# Altium PCB STM32.PcbDoc (part 5 of 6)
Units mm, origin at the board's own origin, x right, y up, seen from the top; angles counter-clockwise.
Board outline 99.69 x 99.7 mm, 2 copper layers (Top Layer, Bottom Layer); 150 components, 142 nets, 668 pads, 273 vias.
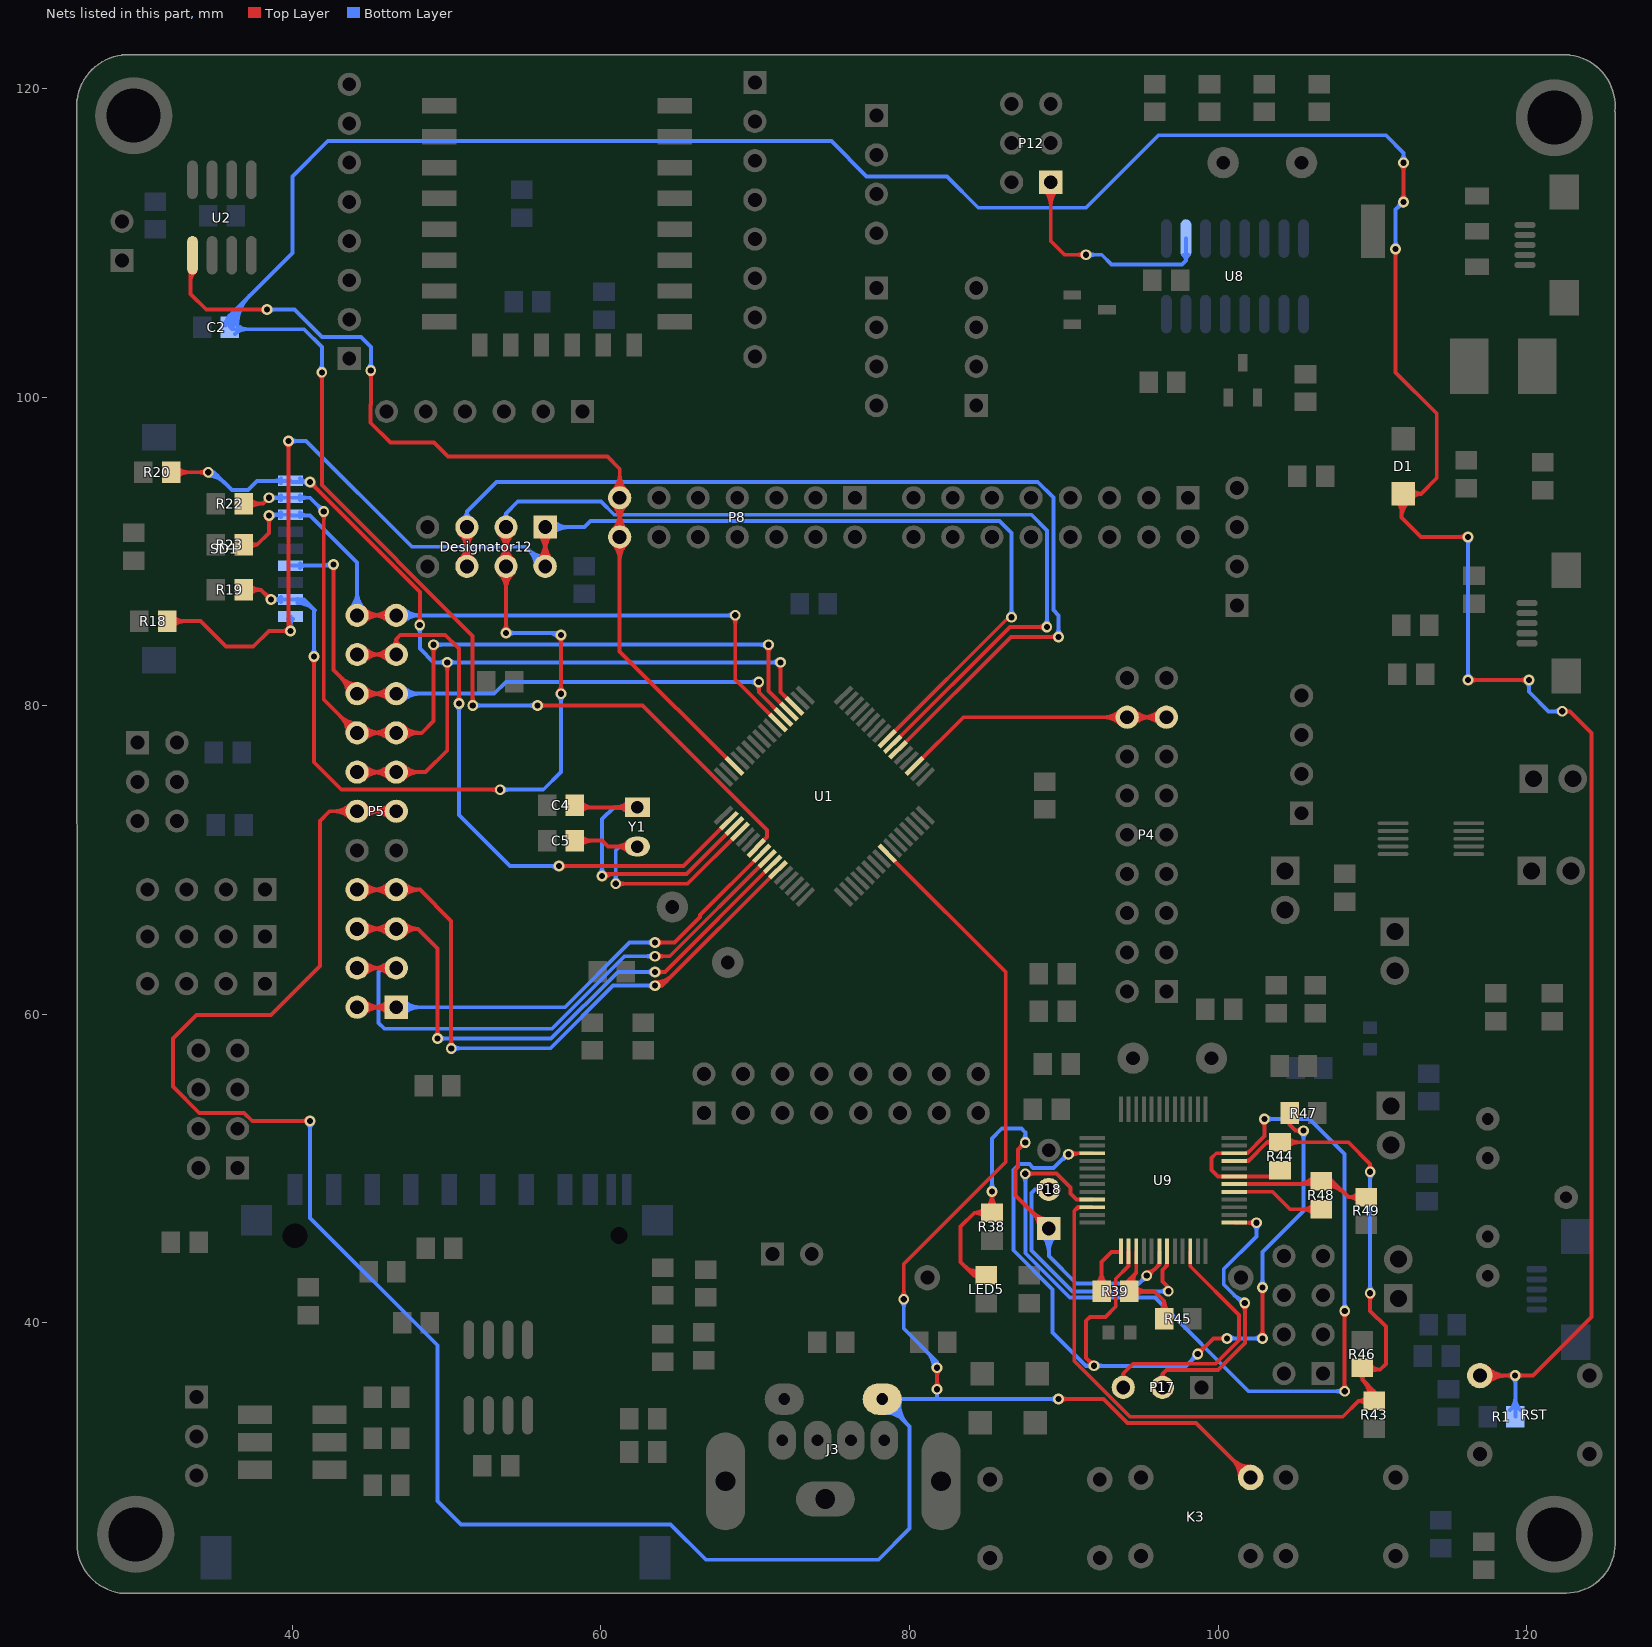
[diagram p5: the nets of this part, all layers, seen from the top]

## Via types
v1: diameter 0.7, hole 0.4, Top Layer to Bottom Layer, 272 vias
v2: diameter 1.27, hole 0.711, Top Layer to Bottom Layer, 1 vias

## Nets (pads, with @x,y where several pads share a name; then routed paths per layer and width w, separated by ;. In a path a pad name is that pad's centre, name@x,y a point inside that pad or via, vN(x,y) a via of type N, cw(c..) or ccw(c..) an arc to the next point about the centre after c; other vN are vias at no path point) (continued)
PB9: P8.13 P8.14 U1.62 U2.1 | length 79.6
  Top Layer w0.25: 33.401,107.433 cw(c34.378,107.433) U2.1@33.687,108.124 ; U2.1@33.528,109.183 33.401,109.056 33.401,106.68 34.417,105.664 v1(38.354,105.664) ; v1@38.195,105.505 ccw(c37.811,105.121) 37.811,105.664 ccw(c37.811,106.207) v1@38.195,105.823 ; v1@44.926,101.568 cw(c44.542,101.184) 45.085,101.184 cw(c45.628,101.184) v1@45.244,101.568 ; v1(45.085,101.727) 45.085,99.508 45.074,99.497 45.074,98.331 46.355,97.049 49.189,97.049 50.091,96.147 60.423,96.147 61.214,95.356 P8.13@61.214,93.472 P8.14@61.214,90.932 ; P8.14@60.772,91.374 ccw(c59.705,92.441) 61.214,92.441 ccw(c62.723,92.441) P8.14@61.656,91.374 ; P8.13@60.772,93.03 cw(c59.705,91.963) 61.214,91.963 cw(c62.723,91.963) P8.13@61.656,93.03 ; P8.13@60.772,93.914 ccw(c59.705,94.981) 61.214,94.981 ccw(c62.723,94.981) P8.13@61.656,93.914 ; P8.14@60.949,91.197 ccw(c60.309,91.837) 61.214,91.837 ccw(c62.119,91.837) P8.14@61.479,91.197 ; P8.13@60.949,93.207 cw(c60.309,92.567) 61.214,92.567 cw(c62.119,92.567) P8.13@61.479,93.207 ; P8.13@60.949,93.737 ccw(c60.309,94.377) 61.214,94.377 ccw(c62.119,94.377) P8.13@61.479,93.737
  Top Layer w0.254: P8.14@60.773,90.491 cw(c59.71,89.428) 61.214,89.428 cw(c62.718,89.428) P8.14@61.655,90.491 ; P8.14@60.953,90.671 cw(c60.323,90.041) 61.214,90.041 cw(c62.105,90.041) P8.14@61.475,90.671 ; P8.14@61.214,90.932 61.214,83.518 U1.62@68.652,76.08
  Bottom Layer w0.25: v1(38.354,105.664) 40.132,105.664 41.91,103.886 44.45,103.886 45.085,103.251 v1(45.085,101.727) ; v1@38.513,105.505 cw(c38.897,105.121) 38.897,105.664 cw(c38.897,106.207) v1@38.513,105.823 ; v1@44.926,101.886 ccw(c44.542,102.27) 45.085,102.27 ccw(c45.628,102.27) v1@45.244,101.886
PB14: P4.15 P4.16 U1.35 | length 29
  Top Layer w0.25: U1.35@80.319,76.08 83.487,79.248 P4.16@94.107,79.248 P4.15@96.647,79.248 ; P4.16@93.665,78.806 ccw(c92.598,77.739) 92.598,79.248 ccw(c92.598,80.757) P4.16@93.665,79.69 ; P4.16@93.842,78.983 ccw(c93.202,78.343) 93.202,79.248 ccw(c93.202,80.153) P4.16@93.842,79.513 ; P4.16@94.372,78.983 cw(c95.012,78.343) 95.012,79.248 cw(c95.012,80.153) P4.16@94.372,79.513 ; P4.16@94.549,78.806 cw(c95.616,77.739) 95.616,79.248 cw(c95.616,80.757) P4.16@94.549,79.69 ; P4.15@96.205,78.806 ccw(c95.138,77.739) 95.138,79.248 ccw(c95.138,80.757) P4.15@96.205,79.69 ; P4.15@96.382,78.983 ccw(c95.742,78.343) 95.742,79.248 ccw(c95.742,80.153) P4.15@96.382,79.513
PC0: P5.1 P5.2 U1.8 | length 43.5
  Top Layer w0.25: P5.2@44.196,60.452 P5.1@46.736,60.452 ; P5.2@44.461,60.187 cw(c45.101,59.547) 45.101,60.452 cw(c45.101,61.357) P5.2@44.461,60.717 ; P5.2@44.638,60.01 cw(c45.705,58.943) 45.705,60.452 cw(c45.705,61.961) P5.2@44.638,60.894 ; P5.1@46.294,60.01 ccw(c45.227,58.943) 45.227,60.452 ccw(c45.227,61.961) P5.1@46.294,60.894 ; P5.1@46.471,60.187 ccw(c45.831,59.547) 45.831,60.452 ccw(c45.831,61.357) P5.1@46.471,60.717
  Top Layer w0.254: v1(63.5,64.643) 64.772,64.643 66.421,66.292 66.421,66.424 U1.8@70.42,70.423 ; v1@63.658,64.485 cw(c64.038,64.105) 64.038,64.643 cw(c64.038,65.181) v1@63.658,64.801
  Bottom Layer w0.254: P5.1@46.736,60.452 57.658,60.452 61.849,64.643 v1(63.5,64.643) ; P5.1@46.997,60.191 cw(c47.627,59.561) 47.627,60.452 cw(c47.627,61.343) P5.1@46.997,60.713 ; P5.1@47.177,60.011 cw(c48.24,58.948) 48.24,60.452 cw(c48.24,61.956) P5.1@47.177,60.893 ; v1@63.342,64.485 ccw(c62.962,64.105) 62.962,64.643 ccw(c62.962,65.181) v1@63.342,64.801
PC1: P5.3 P5.4 U1.9 | length 47.1
  Top Layer w0.25: P5.4@44.196,62.992 P5.3@46.736,62.992 ; P5.4@44.461,62.727 cw(c45.101,62.087) 45.101,62.992 cw(c45.101,63.897) P5.4@44.461,63.257 ; P5.4@44.638,62.55 cw(c45.705,61.483) 45.705,62.992 cw(c45.705,64.501) P5.4@44.638,63.434 ; P5.3@46.294,62.55 ccw(c45.227,61.483) 45.227,62.992 ccw(c45.227,64.501) P5.3@46.294,63.434 ; P5.3@46.471,62.727 ccw(c45.831,62.087) 45.831,62.992 ccw(c45.831,63.897) P5.3@46.471,63.257
  Top Layer w0.254: v1(63.5,63.754) 64.458,63.754 U1.9@70.773,70.07 ; v1@63.658,63.596 cw(c64.038,63.216) 64.038,63.754 cw(c64.038,64.292) v1@63.658,63.912
  Bottom Layer w0.254: P5.3@46.15,62.779 ccw(c45.847,62.669) 45.847,62.992 ; P5.3@46.15,63.205 cw(c45.847,63.315) 45.847,62.992 ; P5.3@46.736,62.992 45.847,62.992 ; v1@63.342,63.596 ccw(c62.962,63.216) 62.962,63.754 ccw(c62.962,64.292) v1@63.342,63.912 ; v1(63.5,63.754) 61.535,63.754 56.836,59.055 45.974,59.055 45.593,59.436 45.593,62.738 45.847,62.992
PC2: P5.5 P5.6 U1.10 | length 52.3
  Top Layer w0.25: P5.6@44.196,65.532 P5.5@46.736,65.532 ; P5.6@44.461,65.267 cw(c45.101,64.627) 45.101,65.532 cw(c45.101,66.437) P5.6@44.461,65.797 ; P5.6@44.638,65.09 cw(c45.705,64.023) 45.705,65.532 cw(c45.705,67.041) P5.6@44.638,65.974 ; P5.5@46.294,65.09 ccw(c45.227,64.023) 45.227,65.532 ccw(c45.227,67.041) P5.5@46.294,65.974 ; P5.5@46.471,65.267 ccw(c45.831,64.627) 45.831,65.532 ccw(c45.831,66.437) P5.5@46.471,65.797
  Top Layer w0.254: P5.5@46.736,65.532 48.133,65.532 ; P5.5@47.011,65.285 cw(c47.563,64.789) 47.563,65.532 cw(c47.563,66.275) P5.5@47.011,65.779 ; P5.5@47.2,65.116 cw(c48.133,64.277) 48.133,65.532 ; P5.5@47.2,65.948 ccw(c48.133,66.787) 48.133,65.532 ; v1@49.245,58.578 ccw(c48.865,58.958) 49.403,58.958 ccw(c49.941,58.958) v1@49.561,58.578 ; v1(49.403,58.42) 49.403,64.262 48.133,65.532 ; v1(63.5,62.738) 64.149,62.738 U1.10@71.127,69.716 ; v1@63.658,62.58 cw(c64.038,62.2) 64.038,62.738 cw(c64.038,63.276) v1@63.658,62.896
  Bottom Layer w0.254: v1(49.403,58.42) 56.775,58.42 61.093,62.738 v1(63.5,62.738) ; v1@49.561,58.262 cw(c49.941,57.882) 49.941,58.42 cw(c49.941,58.958) v1@49.561,58.578 ; v1@63.342,62.58 ccw(c62.962,62.2) 62.962,62.738 ccw(c62.962,63.276) v1@63.342,62.896
PC3: P5.7 P5.8 U1.11 | length 58
  Top Layer w0.25: P5.8@44.196,68.072 P5.7@46.736,68.072 ; P5.8@44.461,67.807 cw(c45.101,67.167) 45.101,68.072 cw(c45.101,68.977) P5.8@44.461,68.337 ; P5.8@44.638,67.63 cw(c45.705,66.563) 45.705,68.072 cw(c45.705,69.581) P5.8@44.638,68.514 ; P5.7@46.294,67.63 ccw(c45.227,66.563) 45.227,68.072 ccw(c45.227,69.581) P5.7@46.294,68.514 ; P5.7@46.471,67.807 ccw(c45.831,67.167) 45.831,68.072 ccw(c45.831,68.977) P5.7@46.471,68.337
  Top Layer w0.254: P5.7@46.736,68.072 48.26,68.072 50.292,66.04 v1(50.292,57.785) ; P5.7@46.997,67.811 cw(c47.627,67.181) 47.627,68.072 cw(c47.627,68.963) P5.7@46.997,68.333 ; P5.7@47.177,67.631 cw(c48.24,66.568) 48.24,68.072 cw(c48.24,69.576) P5.7@47.177,68.513 ; v1@50.134,57.943 ccw(c49.754,58.323) 50.292,58.323 ccw(c50.83,58.323) v1@50.45,57.943 ; v1@63.5,61.818 ccw(c63.5,62.871) 64.245,62.126 ; v1(63.5,61.849) 63.967,61.849 ; v1@63.5,62.072 ccw(c63.5,63.738) 64.678,62.56 ; v1@63.673,61.709 cw(c63.967,61.471) 63.967,61.849 ; v1@63.673,61.989 ccw(c63.967,62.227) 63.967,61.849 ; U1.11@71.481,69.362 63.967,61.849
  Bottom Layer w0.254: v1(50.292,57.785) 50.243,57.785 50.243,57.791 56.721,57.791 60.779,61.849 v1(63.5,61.849) ; v1@50.45,57.627 cw(c50.844,57.233) 50.844,57.791 ; v1@50.45,57.943 ccw(c50.817,58.31) 50.817,57.791 ; v1@63.342,61.691 ccw(c62.962,61.311) 62.962,61.849 ccw(c62.962,62.387) v1@63.342,62.007
PC5: J3.1 K3.2 P5.11 P5.12 U1.25 | length 207.5
  Top Layer w0.25: P5.12@44.196,73.152 P5.11@46.736,73.152 ; P5.12@44.461,72.887 cw(c45.101,72.247) 45.101,73.152 cw(c45.101,74.057) P5.12@44.461,73.417 ; P5.12@44.638,72.71 cw(c45.705,71.643) 45.705,73.152 cw(c45.705,74.661) P5.12@44.638,73.594 ; P5.11@46.294,72.71 ccw(c45.227,71.643) 45.227,73.152 ccw(c45.227,74.661) P5.11@46.294,73.594 ; P5.11@46.471,72.887 ccw(c45.831,72.247) 45.831,73.152 ccw(c45.831,74.057) P5.11@46.471,73.417 ; U1.25@78.552,70.423 86.233,62.742 86.233,50.418 79.629,43.814 v1(79.629,41.529) ; v1@79.47,41.688 ccw(c79.086,42.072) 79.629,42.072 ccw(c80.172,42.072) v1@79.788,41.688 ; v1@81.629,35.846 ccw(c81.245,36.23) 81.788,36.23 ccw(c82.331,36.23) v1@81.947,35.846 ; v1@81.629,36.925 cw(c81.245,36.541) 81.788,36.541 cw(c82.331,36.541) v1@81.947,36.925 ; v1(81.788,35.687) v1(81.788,37.084)
  Top Layer w0.254: v1@40.99,52.928 ccw(c40.61,52.548) 40.61,53.086 ccw(c40.61,53.624) v1@40.99,53.244 ; v1(41.148,53.086) 37.397,53.086 36.875,53.607 33.964,53.607 32.258,55.313 32.258,58.42 33.782,59.944 38.608,59.944 41.783,63.119 41.783,72.517 42.418,73.152 P5.12@44.196,73.152 ; P5.12@43.755,72.711 ccw(c42.692,71.648) 42.692,73.152 ccw(c42.692,74.656) P5.12@43.755,73.593 ; P5.12@43.935,72.891 ccw(c43.305,72.261) 43.305,73.152 ccw(c43.305,74.043) P5.12@43.935,73.413 ; v1(89.662,35.052) 92.584,35.052 94.134,33.503 98.577,33.503 K3.2@102.108,29.972 ; v1@89.82,34.894 cw(c90.2,34.514) 90.2,35.052 cw(c90.2,35.59) v1@89.82,35.21 ; K3.2@101.409,29.972 ccw(c99.721,29.972) 100.914,31.166 ccw(c102.108,32.359) K3.2@102.108,30.671 ; K3.2@101.663,29.972 ccw(c100.588,29.972) 101.348,30.732 ccw(c102.108,31.492) K3.2@102.108,30.417
  Bottom Layer w0.25: v1@79.47,41.37 cw(c79.086,40.986) 79.629,40.986 cw(c80.172,40.986) v1@79.788,41.37 ; v1(79.629,41.529) 79.629,39.624 81.788,37.465 v1(81.788,37.084) ; 81.134,38.119 cw(c80.1,37.084) v1@81.563,37.084 ; 81.561,37.692 cw(c80.954,37.084) v1@81.813,37.084 ; 81.788,35.052 v1(81.788,35.687)
  Bottom Layer w0.254: v1@40.99,52.928 cw(c40.61,52.548) 41.148,52.548 cw(c41.686,52.548) v1@41.306,52.928 ; v1(41.148,53.086) 41.148,46.796 49.403,38.541 49.403,28.448 50.927,26.924 64.516,26.924 66.802,24.638 77.978,24.638 80.01,26.67 80.01,33.274 J3.1@78.232,35.052 81.788,35.052 v1(89.662,35.052) ; J3.1@78.486,34.163 cw(c78.486,32.63) 79.57,33.714 ; J3.1@78.486,34.417 cw(c78.486,33.497) 79.136,34.148 ; J3.1@78.864,35.001 ccw(c79.893,34.861) 79.158,34.126 ; J3.1@79.115,34.966 ccw(c80.531,34.774) 79.521,33.763 ; J3.1@79.367,34.932 ccw(c81.169,34.687) 79.883,33.401 ; v1@89.504,34.894 ccw(c89.124,34.514) 89.124,35.052 ccw(c89.124,35.59) v1@89.504,35.21
PC7: Designator12.5 Designator12.6 U1.38 | length 75.8
  Top Layer w0.25: Designator12.6@50.866,89.469 ccw(c49.799,90.536) 51.308,90.536 ccw(c52.817,90.536) Designator12.6@51.75,89.469 ; Designator12.5@50.866,91.125 cw(c49.799,90.058) 51.308,90.058 cw(c52.817,90.058) Designator12.5@51.75,91.125 ; Designator12.6@51.043,89.292 ccw(c50.403,89.932) 51.308,89.932 ccw(c52.213,89.932) Designator12.6@51.573,89.292 ; Designator12.5@51.043,91.302 cw(c50.403,90.662) 51.308,90.662 cw(c52.213,90.662) Designator12.5@51.573,91.302 ; Designator12.6@51.308,89.027 Designator12.5@51.308,91.567
  Top Layer w0.254: U1.38@79.259,77.141 86.573,84.455 v1(89.662,84.455) ; v1@89.504,84.297 ccw(c89.124,83.917) 89.124,84.455 ccw(c89.124,84.993) v1@89.504,84.613
  Bottom Layer w0.254: Designator12.5@51.025,92.122 ccw(c50.791,92.583) 51.308,92.583 ; Designator12.5@51.308,91.567 51.308,92.583 ; Designator12.5@51.591,92.122 cw(c51.825,92.583) 51.308,92.583 ; v1@89.504,84.613 ccw(c89.124,84.993) 89.662,84.993 ccw(c90.2,84.993) v1@89.82,84.613 ; v1(89.662,84.455) 89.662,85.852 89.32,86.194 89.32,93.492 88.31,94.501 53.226,94.501 51.308,92.583
PC8: Designator12.3 Designator12.4 R19.2 SD1.7 U1.39 | length 136.6
  Top Layer w0.25: Designator12.4@53.406,88.585 cw(c52.339,87.518) 53.848,87.518 cw(c55.357,87.518) Designator12.4@54.29,88.585 ; Designator12.4@53.406,89.469 ccw(c52.339,90.536) 53.848,90.536 ccw(c55.357,90.536) Designator12.4@54.29,89.469 ; Designator12.3@53.406,91.125 cw(c52.339,90.058) 53.848,90.058 cw(c55.357,90.058) Designator12.3@54.29,91.125 ; Designator12.4@53.583,88.762 cw(c52.943,88.122) 53.848,88.122 cw(c54.753,88.122) Designator12.4@54.113,88.762 ; Designator12.4@53.583,89.292 ccw(c52.943,89.932) 53.848,89.932 ccw(c54.753,89.932) Designator12.4@54.113,89.292 ; Designator12.3@53.583,91.302 cw(c52.943,90.662) 53.848,90.662 cw(c54.753,90.662) Designator12.3@54.113,91.302 ; v1@53.689,84.868 ccw(c53.305,85.252) 53.848,85.252 ccw(c54.391,85.252) v1@54.007,84.868 ; v1(53.848,84.709) Designator12.4@53.848,89.027 Designator12.3@53.848,91.567
  Top Layer w0.254: R19.2@36.841,87.503 37.973,87.503 ; R19.2@37.178,87.171 cw(c37.973,86.385) 37.973,87.503 ; R19.2@37.178,87.835 ccw(c37.973,88.621) 37.973,87.503 ; v1@38.385,86.868 ccw(c37.847,86.868) 38.227,87.249 ccw(c38.608,87.629) v1@38.608,87.091 ; v1(38.608,86.868) 37.973,87.503 ; v1@41.244,83.027 cw(c40.864,82.647) 41.402,82.647 cw(c41.94,82.647) v1@41.56,83.027 ; v1(41.402,83.185) 41.402,76.327 43.18,74.549 v1(53.467,74.549) ; v1@53.309,74.391 ccw(c52.929,74.011) 52.929,74.549 ccw(c52.929,75.087) v1@53.309,74.707 ; v1@57.246,80.93 ccw(c56.866,81.31) 57.404,81.31 ccw(c57.942,81.31) v1@57.562,80.93 ; v1@57.246,84.424 cw(c56.866,84.044) 57.404,84.044 cw(c57.942,84.044) v1@57.562,84.424 ; v1(57.404,80.772) v1(57.404,84.582) ; U1.39@78.905,77.494 86.501,85.09 v1(88.9,85.09) ; v1@88.742,84.932 ccw(c88.362,84.552) 88.362,85.09 ccw(c88.362,85.628) v1@88.742,85.248
  Bottom Layer w0.25: v1(53.848,84.709) 57.277,84.709 v1(57.404,84.582) ; v1@54.007,84.55 cw(c54.391,84.166) 54.391,84.709 cw(c54.391,85.252) v1@54.007,84.868 ; 56.554,84.709 cw(c56.554,83.732) v1@57.245,84.423
  Bottom Layer w0.254: v1(38.608,86.868) 38.61,86.87 SD1.7@39.878,86.87 40.765,86.87 41.402,86.233 v1(41.402,83.185) ; v1@38.766,86.71 cw(c39.151,86.325) SD1.7@39.151,86.87 ; v1@38.766,87.026 ccw(c39.141,87.401) SD1.7@39.141,86.87 ; SD1.7@39.27,86.712 ccw(c38.89,86.332) 38.89,86.87 ccw(c38.89,87.408) SD1.7@39.27,87.028 ; SD1.7@40.328,86.647 cw(c40.328,85.054) 41.455,86.18 ; SD1.7@40.328,86.901 cw(c40.328,85.921) 41.021,86.614 ; v1@41.244,83.343 ccw(c40.864,83.723) 41.402,83.723 ccw(c41.94,83.723) v1@41.56,83.343 ; v1(53.467,74.549) 56.261,74.549 57.404,75.692 v1(57.404,80.772) ; v1@53.625,74.391 cw(c54.005,74.011) 54.005,74.549 cw(c54.005,75.087) v1@53.625,74.707 ; Designator12.3@53.635,92.153 ccw(c53.525,92.456) 53.848,92.456 ; Designator12.3@53.848,91.567 53.848,92.456 ; Designator12.3@54.061,92.153 cw(c54.171,92.456) 53.848,92.456 ; v1@57.246,80.614 cw(c56.866,80.234) 57.404,80.234 cw(c57.942,80.234) v1@57.562,80.614 ; v1@88.742,85.248 ccw(c88.329,85.661) 88.913,85.661 ; v1(88.9,85.09) 88.913,85.103 88.913,91.358 87.904,92.368 60.862,92.368 60.012,93.218 54.61,93.218 53.848,92.456 ; 88.913,85.596 ccw(c89.406,85.596) v1@89.058,85.248
PC9: Designator12.1 Designator12.2 R18.2 SD1.8 U1.40 | length 115.2
  Top Layer w0.25: v1@39.592,96.996 cw(c39.208,96.612) 39.751,96.612 cw(c40.294,96.612) v1@39.91,96.996 ; 39.751,85.686 ccw(c40.728,85.686) v1@40.037,84.995 ; v1(39.751,97.155) 39.751,84.963 v1(39.878,84.836) ; Designator12.2@55.946,89.469 ccw(c54.879,90.536) 56.388,90.536 ccw(c57.897,90.536) Designator12.2@56.83,89.469 ; Designator12.1@55.946,91.125 cw(c54.879,90.058) 56.388,90.058 cw(c57.897,90.058) Designator12.1@56.83,91.125 ; Designator12.2@56.123,89.292 ccw(c55.483,89.932) 56.388,89.932 ccw(c57.293,89.932) Designator12.2@56.653,89.292 ; Designator12.1@56.123,91.302 cw(c55.483,90.662) 56.388,90.662 cw(c57.293,90.662) Designator12.1@56.653,91.302 ; Designator12.2@56.388,89.027 Designator12.1@56.388,91.567
  Top Layer w0.254: R18.2@31.888,85.471 34.036,85.471 35.687,83.82 37.465,83.82 38.481,84.836 v1(39.878,84.836) ; R18.2@32.222,85.137 cw(c33.03,84.329) 33.03,85.471 cw(c33.03,86.613) R18.2@32.222,85.805 ; v1@39.72,84.678 ccw(c39.34,84.298) 39.34,84.836 ccw(c39.34,85.374) v1@39.72,84.994 ; U1.40@78.552,77.848 86.429,85.725 v1(86.614,85.725)
  Bottom Layer w0.25: v1(39.751,97.155) 40.894,97.155 47.752,90.297 55.118,90.297 Designator12.2@56.388,89.027 ; v1@39.91,96.996 cw(c40.294,96.612) 40.294,97.155 cw(c40.294,97.698) v1@39.91,97.314 ; Designator12.2@55.763,89.027 ccw(c54.254,89.027) 55.321,90.094 ccw(c56.388,91.161) Designator12.2@56.388,89.652 ; Designator12.2@56.013,89.027 ccw(c55.108,89.027) 55.748,89.667 ccw(c56.388,90.307) Designator12.2@56.388,89.402
  Bottom Layer w0.254: v1@39.72,84.994 ccw(c39.34,85.374) 39.878,85.374 ccw(c40.416,85.374) v1@40.036,84.994 ; SD1.8@39.72,85.612 cw(c39.34,85.232) 39.878,85.232 cw(c40.416,85.232) SD1.8@40.036,85.612 ; v1(39.878,84.836) SD1.8@39.878,85.77 ; Designator12.1@56.388,91.567 58.928,91.567 59.322,91.961 85.839,91.961 86.614,91.186 v1(86.614,85.725) ; Designator12.1@56.649,91.306 cw(c57.279,90.676) 57.279,91.567 cw(c57.279,92.458) Designator12.1@56.649,91.828 ; Designator12.1@56.829,91.126 cw(c57.892,90.063) 57.892,91.567 cw(c57.892,93.071) Designator12.1@56.829,92.008 ; v1@86.456,85.883 ccw(c86.076,86.263) 86.614,86.263 ccw(c87.152,86.263) v1@86.772,85.883
PC10: P5.13 P5.14 R20.2 SD1.9 U1.51 | length 87.5
  Top Layer w0.25: P5.14@44.196,75.692 P5.13@46.736,75.692 ; P5.14@44.461,75.427 cw(c45.101,74.787) 45.101,75.692 cw(c45.101,76.597) P5.14@44.461,75.957 ; P5.14@44.638,75.25 cw(c45.705,74.183) 45.705,75.692 cw(c45.705,77.201) P5.14@44.638,76.134 ; P5.13@46.294,75.25 ccw(c45.227,74.183) 45.227,75.692 ccw(c45.227,77.201) P5.13@46.294,76.134 ; P5.13@46.471,75.427 ccw(c45.831,74.787) 45.831,75.692 ccw(c45.831,76.597) P5.13@46.471,75.957
  Top Layer w0.254: R20.2@32.142,95.123 v1(34.544,95.123) ; R20.2@32.476,94.789 cw(c33.284,93.981) 33.284,95.123 cw(c33.284,96.265) R20.2@32.476,95.457 ; v1@34.386,94.965 ccw(c34.006,94.585) 34.006,95.123 ccw(c34.006,95.661) v1@34.386,95.281 ; v1@41.148,94.265 cw(c41.148,93.727) 41.529,94.107 cw(c41.909,94.488) v1@41.371,94.488 ; v1(41.148,94.488) 48.26,87.376 v1(48.26,85.217) ; P5.13@46.736,75.692 48.641,75.692 50.038,77.089 v1(50.038,82.804) ; P5.13@46.997,75.431 cw(c47.627,74.801) 47.627,75.692 cw(c47.627,76.583) P5.13@46.997,75.953 ; P5.13@47.177,75.251 cw(c48.24,74.188) 48.24,75.692 cw(c48.24,77.196) P5.13@47.177,76.133 ; v1@48.102,85.375 ccw(c47.722,85.755) 48.26,85.755 ccw(c48.798,85.755) v1@48.418,85.375 ; v1@49.88,82.646 cw(c49.5,82.266) 50.038,82.266 cw(c50.576,82.266) v1@50.196,82.646 ; v1@71.47,82.646 cw(c71.09,82.266) 71.628,82.266 cw(c72.166,82.266) v1@71.786,82.646 ; v1(71.628,82.804) 71.628,80.882 U1.51@72.541,79.969
  Bottom Layer w0.254: v1@34.544,94.9 cw(c34.544,93.442) 35.575,94.473 ; v1(34.544,95.123) 34.925,95.123 36.081,93.967 37.115,93.967 37.718,94.57 SD1.9@39.878,94.57 39.96,94.488 v1(41.148,94.488) ; v1@34.544,95.154 cw(c34.544,94.309) 35.141,94.907 ; SD1.9@39.27,94.412 ccw(c38.89,94.032) 38.89,94.57 ccw(c38.89,95.108) SD1.9@39.27,94.728 ; SD1.9@40.486,94.728 ccw(c41.064,95.306) v1@41.064,94.488 ; v1@40.99,94.33 ccw(c40.61,93.95) 40.61,94.488 ccw(c40.61,95.026) v1@40.99,94.646 ; v1@48.102,85.059 cw(c47.722,84.679) 48.26,84.679 cw(c48.798,84.679) v1@48.418,85.059 ; v1(48.26,85.217) 48.26,83.693 49.149,82.804 v1(50.038,82.804) v1(71.628,82.804) ; v1@49.88,82.646 ccw(c49.5,82.266) 49.5,82.804 ccw(c49.5,83.342) v1@49.88,82.962 ; v1@50.196,82.646 cw(c50.576,82.266) 50.576,82.804 cw(c50.576,83.342) v1@50.196,82.962 ; v1@71.47,82.646 ccw(c71.09,82.266) 71.09,82.804 ccw(c71.09,83.342) v1@71.47,82.962
PC11: P5.15 P5.16 R22.2 SD1.1 U1.52 | length 82.4
  Top Layer w0.25: R22.2@36.841,93.091 38.1,93.091 v1(38.481,93.472) ; R22.2@37.177,92.755 cw(c37.988,91.944) 37.988,93.091 cw(c37.988,94.238) R22.2@37.177,93.427 ; v1@41.878,92.424 cw(c41.494,92.04) 42.037,92.04 cw(c42.58,92.04) v1@42.196,92.424 ; v1(42.037,92.583) 42.037,80.391 P5.16@44.196,78.232 P5.15@46.736,78.232 ; P5.16@43.571,78.232 ccw(c42.062,78.232) 43.129,79.299 ccw(c44.196,80.366) P5.16@44.196,78.857 ; P5.16@43.821,78.232 ccw(c42.916,78.232) 43.556,78.872 ccw(c44.196,79.512) P5.16@44.196,78.607 ; P5.16@44.461,77.967 cw(c45.101,77.327) 45.101,78.232 cw(c45.101,79.137) P5.16@44.461,78.497 ; P5.16@44.638,77.79 cw(c45.705,76.723) 45.705,78.232 cw(c45.705,79.741) P5.16@44.638,78.674 ; P5.15@46.294,77.79 ccw(c45.227,76.723) 45.227,78.232 ccw(c45.227,79.741) P5.15@46.294,78.674 ; P5.15@46.471,77.967 ccw(c45.831,77.327) 45.831,78.232 ccw(c45.831,79.137) P5.15@46.471,78.497
  Top Layer w0.254: P5.15@46.736,78.232 48.387,78.232 49.149,78.994 v1(49.149,83.947) ; P5.15@46.997,77.971 cw(c47.627,77.341) 47.627,78.232 cw(c47.627,79.123) P5.15@46.997,78.493 ; P5.15@47.177,77.791 cw(c48.24,76.728) 48.24,78.232 cw(c48.24,79.736) P5.15@47.177,78.673 ; v1@48.991,83.789 cw(c48.611,83.409) 49.149,83.409 cw(c49.687,83.409) v1@49.307,83.789 ; v1@70.708,83.789 cw(c70.328,83.409) 70.866,83.409 cw(c71.404,83.409) v1@71.024,83.789 ; v1(70.866,83.947) 70.866,80.937 U1.52@72.188,79.615
  Bottom Layer w0.25: v1(38.481,93.472) 38.483,93.47 SD1.1@39.878,93.47 41.15,93.47 v1(42.037,92.583) ; v1@38.64,93.313 cw(c39.019,92.934) 39.019,93.47 ; v1@38.64,93.631 ccw(c39.029,94.02) 39.029,93.47 ; SD1.1@39.269,93.311 ccw(c38.885,92.927) 38.885,93.47 ccw(c38.885,94.013) SD1.1@39.269,93.629 ; SD1.1@40.487,93.311 cw(c40.871,92.927) 40.871,93.47 cw(c40.871,94.013) SD1.1@40.487,93.629 ; v1@41.812,92.583 ccw(c41.269,92.583) 41.653,92.967 ccw(c42.037,93.351) v1@42.037,92.808
  Bottom Layer w0.254: v1(49.149,83.947) v1(70.866,83.947) ; v1@49.307,83.789 cw(c49.687,83.409) 49.687,83.947 cw(c49.687,84.485) v1@49.307,84.105 ; v1@70.708,83.789 ccw(c70.328,83.409) 70.328,83.947 ccw(c70.328,84.485) v1@70.708,84.105
PC12: P5.17 P5.18 SD1.5 U1.53 | length 60.5
  Top Layer w0.25: v1@42.513,88.995 cw(c42.129,88.611) 42.672,88.611 cw(c43.215,88.611) v1@42.831,88.995 ; v1(42.672,89.154) 42.672,82.296 P5.18@44.196,80.772 P5.17@46.736,80.772 ; P5.18@43.571,80.772 ccw(c42.062,80.772) 43.129,81.839 ccw(c44.196,82.906) P5.18@44.196,81.397 ; P5.18@43.821,80.772 ccw(c42.916,80.772) 43.556,81.412 ccw(c44.196,82.052) P5.18@44.196,81.147 ; P5.18@44.461,80.507 cw(c45.101,79.867) 45.101,80.772 cw(c45.101,81.677) P5.18@44.461,81.037 ; P5.18@44.638,80.33 cw(c45.705,79.263) 45.705,80.772 cw(c45.705,82.281) P5.18@44.638,81.214 ; P5.17@46.294,80.33 ccw(c45.227,79.263) 45.227,80.772 ccw(c45.227,82.281) P5.17@46.294,81.214 ; P5.17@46.471,80.507 ccw(c45.831,79.867) 45.831,80.772 ccw(c45.831,81.677) P5.17@46.471,81.037
  Top Layer w0.254: v1@70.073,81.376 cw(c69.693,80.996) 70.231,80.996 cw(c70.769,80.996) v1@70.389,81.376 ; v1(70.231,81.534) 70.231,80.865 U1.53@71.834,79.262
  Bottom Layer w0.25: SD1.5@39.878,89.07 42.588,89.07 v1(42.672,89.154) ; SD1.5@40.487,88.911 cw(c40.871,88.527) 40.871,89.07 cw(c40.871,89.613) SD1.5@40.487,89.229 ; 41.926,89.07 ccw(c41.926,89.9) v1@42.513,89.313 ; 42.332,89.07 cw(c42.332,88.814) v1@42.513,88.995
  Bottom Layer w0.254: P5.17@46.736,80.772 53.086,80.772 53.848,81.534 v1(70.231,81.534) ; P5.17@46.997,80.511 cw(c47.627,79.881) 47.627,80.772 cw(c47.627,81.663) P5.17@46.997,81.033 ; P5.17@47.177,80.331 cw(c48.24,79.268) 48.24,80.772 cw(c48.24,82.276) P5.17@47.177,81.213 ; v1@70.073,81.376 ccw(c69.693,80.996) 69.693,81.534 ccw(c69.693,82.072) v1@70.073,81.692
PC13: P5.19 P5.20 U1.2 | length 51.1
  Top Layer w0.25: P5.20@44.196,83.312 P5.19@46.736,83.312 ; P5.20@44.461,83.047 cw(c45.101,82.407) 45.101,83.312 cw(c45.101,84.217) P5.20@44.461,83.577 ; P5.20@44.638,82.87 cw(c45.705,81.803) 45.705,83.312 cw(c45.705,84.821) P5.20@44.638,83.754 ; P5.19@46.294,82.87 ccw(c45.227,81.803) 45.227,83.312 ccw(c45.227,84.821) P5.19@46.294,83.754 ; P5.19@46.471,83.047 ccw(c45.831,82.407) 45.831,83.312 ccw(c45.831,84.217) P5.19@46.471,83.577
  Top Layer w0.254: P5.19@46.453,83.867 ccw(c46.219,84.328) 46.736,84.328 ; P5.19@46.736,83.312 46.736,84.328 ; P5.19@47.019,83.867 cw(c47.253,84.328) 46.736,84.328 ; v1@50.642,80.295 ccw(c50.262,80.675) 50.8,80.675 ccw(c51.338,80.675) v1@50.958,80.295 ; v1(50.8,80.137) 50.8,83.693 49.911,84.582 46.99,84.582 46.736,84.328 ; v1(57.277,69.596) 65.35,69.596 U1.2@68.299,72.544 ; v1@57.435,69.438 cw(c57.815,69.058) 57.815,69.596 cw(c57.815,70.134) v1@57.435,69.754
  Bottom Layer w0.254: v1@50.642,79.979 cw(c50.262,79.599) 50.8,79.599 cw(c51.338,79.599) v1@50.958,79.979 ; v1(50.8,80.137) 50.8,72.898 54.102,69.596 v1(57.277,69.596) ; v1@57.119,69.438 ccw(c56.739,69.058) 56.739,69.596 ccw(c56.739,70.134) v1@57.119,69.754
PC14: C4.2 U1.3 Y1.1 | length 27.9
  Top Layer w0.25: C4.2@58.431,73.406 Y1.1@62.357,73.406 ; C4.2@58.463,73.592 ccw(c58.913,74.042) 58.913,73.406 ; C4.2@58.64,73.097 cw(c59.385,72.352) 59.385,73.406 ; C4.2@58.64,73.769 ccw(c59.516,74.645) 59.516,73.406 ; Y1.1@61.819,73.045 ccw(c60.948,72.175) 60.948,73.406 ccw(c60.948,74.637) Y1.1@61.819,73.767
  Top Layer w0.254: v1(60.071,68.961) 60.198,69.088 65.549,69.088 U1.3@68.652,72.191 ; v1@60.229,68.803 cw(c60.916,68.116) 60.916,69.088
  Bottom Layer w0.254: v1@59.913,69.119 ccw(c59.533,69.499) 60.071,69.499 ccw(c60.609,69.499) v1@60.229,69.119 ; v1(60.071,68.961) 60.071,72.644 60.833,73.406 Y1.1@62.357,73.406 ; Y1.1@61.82,73.047 ccw(c60.953,72.18) 60.953,73.406 ccw(c60.953,74.632) Y1.1@61.82,73.765
PC15: C5.2 U1.4 Y1.2 | length 24
  Top Layer w0.25: C5.2@58.304,71.247 60.071,71.247 60.452,70.866 Y1.2@62.357,70.866 ; C5.2@58.64,70.911 cw(c59.451,70.1) 59.451,71.247 cw(c59.451,72.394) C5.2@58.64,71.583 ; v1(60.96,68.453) 65.621,68.453 U1.4@69.006,71.837 ; v1@61.119,68.294 cw(c61.503,67.91) 61.503,68.453 cw(c61.503,68.996) v1@61.119,68.612 ; Y1.2@61.819,70.505 ccw(c60.948,69.635) 60.948,70.866 ccw(c60.948,72.097) Y1.2@61.819,71.227
  Bottom Layer w0.25: v1@60.801,68.612 ccw(c60.417,68.996) 60.96,68.996 ccw(c61.503,68.996) v1@61.119,68.612 ; v1(60.96,68.453) 60.96,70.612 61.214,70.866 ; Y1.2@61.758,70.579 ccw(c61.214,70.208) 61.214,70.866 ; Y1.2@61.758,71.153 cw(c61.214,71.524) 61.214,70.866 ; Y1.2@62.357,70.866 61.214,70.866
PD2: P5.21 P5.22 R23.2 SD1.2 U1.54 | length 67.5
  Top Layer w0.25: R23.2@36.841,90.424 37.719,90.424 ; R23.2@37.239,90.164 cw(c37.719,89.85) 37.719,90.424 ; R23.2@37.239,90.684 ccw(c37.719,90.998) 37.719,90.424 ; v1@38.322,92.17 cw(c37.938,91.786) 38.481,91.786 cw(c39.024,91.786) v1@38.64,92.17 ; v1(38.481,92.329) 38.481,91.186 37.719,90.424 ; P5.22@44.196,85.852 P5.21@46.736,85.852 ; P5.22@44.461,85.587 cw(c45.101,84.947) 45.101,85.852 cw(c45.101,86.757) P5.22@44.461,86.117 ; P5.22@44.638,85.41 cw(c45.705,84.343) 45.705,85.852 cw(c45.705,87.361) P5.22@44.638,86.294 ; P5.21@46.294,85.41 ccw(c45.227,84.343) 45.227,85.852 ccw(c45.227,87.361) P5.21@46.294,86.294 ; P5.21@46.471,85.587 ccw(c45.831,84.947) 45.831,85.852 ccw(c45.831,86.757) P5.21@46.471,86.117
  Top Layer w0.254: v1@68.549,85.694 cw(c68.169,85.314) 68.707,85.314 cw(c69.245,85.314) v1@68.865,85.694 ; v1(68.707,85.852) 68.707,81.682 U1.54@71.481,78.908
  Bottom Layer w0.25: v1(38.481,92.329) 38.608,92.329 38.649,92.37 SD1.2@39.878,92.37 39.919,92.329 41.148,92.329 44.196,89.281 P5.22@44.196,85.852 ; v1@38.64,92.17 cw(c39.123,91.687) SD1.2@39.123,92.37 ; v1@38.64,92.488 ccw(c38.925,92.773) 38.925,92.37 ; SD1.2@39.269,92.211 ccw(c38.885,91.827) 38.885,92.37 ccw(c38.885,92.913) SD1.2@39.269,92.529 ; SD1.2@40.487,92.211 cw(c40.772,91.926) 40.772,92.329 ; SD1.2@40.487,92.529 ccw(c40.97,93.012) 40.97,92.329 ; P5.22@43.754,86.294 ccw(c42.687,87.361) 44.196,87.361 ccw(c45.705,87.361) P5.22@44.638,86.294 ; P5.22@43.931,86.117 ccw(c43.291,86.757) 44.196,86.757 ccw(c45.101,86.757) P5.22@44.461,86.117
  Bottom Layer w0.254: P5.21@46.736,85.852 v1(68.707,85.852) ; P5.21@46.997,85.591 cw(c47.627,84.961) 47.627,85.852 cw(c47.627,86.743) P5.21@46.997,86.113 ; P5.21@47.177,85.411 cw(c48.24,84.348) 48.24,85.852 cw(c48.24,87.356) P5.21@47.177,86.293 ; v1@68.549,85.694 ccw(c68.169,85.314) 68.169,85.852 ccw(c68.169,86.39) v1@68.549,86.01
RESET: C2.1 D1.1 R1.2 RST.1 U1.7 | length 283.6
  Top Layer w0.254: v1@41.752,101.442 cw(c41.372,101.062) 41.91,101.062 cw(c42.448,101.062) v1@42.068,101.442 ; v1(41.91,101.6) 41.91,94.301 51.688,84.523 51.688,80.011 v1(51.689,80.01) ; v1@51.531,80.168 ccw(c51.154,80.545) 51.688,80.545 ; 51.688,80.552 ccw(c52.231,80.552) v1@51.847,80.168 ; v1(55.88,80.01) 62.697,80.01 70.763,71.945 70.763,71.473 U1.7@70.066,70.777 ; v1@56.038,79.852 cw(c56.418,79.472) 56.418,80.01 cw(c56.418,80.548) v1@56.038,80.168 ; v1@111.348,109.443 cw(c110.968,109.063) 111.506,109.063 cw(c112.044,109.063) v1@111.664,109.443 ; v1(111.506,109.601) 111.506,101.6 114.173,98.933 114.173,94.742 113.157,93.726 ; D1.1@111.565,93.277 cw(c110.788,92.5) 111.887,92.5 ; v1@111.856,112.807 ccw(c111.476,113.187) 112.014,113.187 ccw(c112.552,113.187) v1@112.172,112.807 ; v1@111.856,115.031 cw(c111.476,114.651) 112.014,114.651 cw(c112.552,114.651) v1@112.172,115.031 ; 111.887,92.197 cw(c113.167,92.197) D1.1@112.396,93.219 ; 111.887,92.707 cw(c112.783,92.707) D1.1@112.243,93.422 ; v1(112.014,112.649) v1(112.014,115.189) ; D1.1@112.553,93.391 cw(c113.157,93.015) 113.157,93.726 ; D1.1@112.553,94.061 ccw(c113.157,94.437) 113.157,93.726 ; v1@116.047,90.774 ccw(c115.667,90.394) 115.667,90.932 ccw(c115.667,91.47) v1@116.047,91.09 ; v1(116.205,81.661) v1(120.142,81.661) ; v1(116.205,90.932) 113.157,90.932 111.887,92.202 111.887,93.599 D1.1@112.014,93.726 113.157,93.726 ; v1@116.363,81.503 cw(c116.743,81.123) 116.743,81.661 cw(c116.743,82.199) v1@116.363,81.819 ; RST.1@116.967,36.576 v1(119.253,36.576) 120.396,36.576 124.2,40.38 124.2,78.238 122.809,79.629 ; RST.1@117.282,36.261 cw(c118.042,35.501) 118.042,36.576 cw(c118.042,37.651) RST.1@117.282,36.891 ; RST.1@117.461,36.082 cw(c118.655,34.888) 118.655,36.576 cw(c118.655,38.264) RST.1@117.461,37.07 ; v1@119.095,36.418 ccw(c118.715,36.038) 118.715,36.576 ccw(c118.715,37.114) v1@119.095,36.734 ; v1@119.411,36.418 cw(c119.791,36.038) 119.791,36.576 cw(c119.791,37.114) v1@119.411,36.734 ; v1@119.984,81.503 ccw(c119.604,81.123) 119.604,81.661 ccw(c119.604,82.199) v1@119.984,81.819 ; v1(122.301,79.629) 122.809,79.629 ; v1@122.465,79.478 cw(c122.809,79.162) 122.809,79.629 ; v1@122.465,79.78 ccw(c122.809,80.096) 122.809,79.629
  Bottom Layer w0.254: C2.1@35.663,104.621 cw(c36.59,104.621) 35.934,105.276 ; C2.1@35.917,104.621 cw(c37.457,104.621) 36.368,105.71 ; C2.1@36.171,104.621 cw(c38.324,104.621) 36.802,106.144 ; C2.1@36.286,104.087 cw(c37.029,103.344) 37.029,104.394 ; C2.1@36.286,104.756 ccw(c37.159,105.628) 37.159,104.394 ; C2.1@36.425,104.621 cw(c39.191,104.621) 37.235,106.577 ; v1@41.752,101.758 ccw(c41.372,102.138) 41.91,102.138 ccw(c42.448,102.138) v1@42.068,101.758 ; v1(41.91,101.6) 41.91,103.251 40.767,104.394 36.079,104.394 C2.1@35.952,104.521 35.952,105.294 40.005,109.347 40.005,114.3 42.291,116.586 74.93,116.586 77.216,114.3 82.423,114.3 84.455,112.268 91.44,112.268 96.139,116.967 110.871,116.967 112.014,115.824 v1(112.014,115.189) ; v1(51.689,80.01) v1(55.88,80.01) ; v1@51.847,79.852 cw(c52.227,79.472) 52.227,80.01 cw(c52.227,80.548) v1@51.847,80.168 ; v1@55.722,79.852 ccw(c55.342,79.472) 55.342,80.01 ccw(c55.342,80.548) v1@55.722,80.168 ; v1@111.348,109.759 ccw(c110.968,110.139) 111.506,110.139 ccw(c112.044,110.139) v1@111.664,109.759 ; v1(111.506,109.601) 111.506,112.141 v1(112.014,112.649) ; v1@111.791,112.649 cw(c111.253,112.649) 111.633,112.268 cw(c112.014,111.888) v1@112.014,112.426 ; v1@111.856,115.347 ccw(c111.476,115.727) 112.014,115.727 ccw(c112.552,115.727) v1@112.172,115.347 ; v1@116.047,81.819 ccw(c115.667,82.199) 116.205,82.199 ccw(c116.743,82.199) v1@116.363,81.819 ; v1@116.047,90.774 cw(c115.667,90.394) 116.205,90.394 cw(c116.743,90.394) v1@116.363,90.774 ; v1(116.205,81.661) v1(116.205,90.932) ; R1.2@118.93,34.343 ccw(c118.122,35.151) 119.264,35.151 ccw(c120.406,35.151) R1.2@119.598,34.343 ; v1@119.095,36.418 cw(c118.688,36.011) 119.264,36.011 ; v1(119.253,36.576) 119.264,36.565 R1.2@119.264,33.909 ; 119.264,36.064 cw(c119.765,36.064) v1@119.411,36.418 ; v1@119.984,81.503 cw(c119.604,81.123) 120.142,81.123 cw(c120.68,81.123) v1@120.3,81.503 ; v1(120.142,81.661) 120.142,80.899 121.412,79.629 v1(122.301,79.629) ; v1@122.143,79.471 ccw(c121.763,79.091) 121.763,79.629 ccw(c121.763,80.167) v1@122.143,79.787
RX: LED5.1 P18.1 R38.2 U9.30 | length 52.1
  Top Layer w0.254: 83.649,43.605 ccw(c84.224,44.181) LED5.1@84.628,43.475 ; 83.884,43.37 ccw(c84.395,43.882) LED5.1@84.754,43.254 ; 84.119,43.135 ccw(c84.566,43.583) LED5.1@84.88,43.034 ; LED5.1@84.418,42.904 ccw(c84.19,42.822) 84.19,43.064 ; LED5.1@84.418,43.224 cw(c84.19,43.306) 84.19,43.064 ; R38.2@84.886,46.819 ccw(c84.212,46.239) 84.212,47.128 ; R38.2@84.886,47.437 cw(c84.212,48.017) 84.212,47.128 ; LED5.1@84.963,43.064 84.19,43.064 ; R38.2@85.01,47.462 ccw(c84.202,48.27) 85.344,48.27 ccw(c86.486,48.27) R38.2@85.678,47.462 ; v1@85.186,48.356 cw(c84.806,47.976) 85.344,47.976 cw(c85.882,47.976) v1@85.502,48.356 ; v1(85.344,48.514) R38.2@85.344,47.128 84.212,47.128 ; v1@87.28,51.689 cw(c86.742,51.689) 87.122,51.308 cw(c87.503,50.928) v1@87.503,51.466 ; v1(87.503,51.689) 87.04,51.226 87.04,50.084 86.874,49.918 86.874,48.254 P18.1@89.027,46.101 ; P18.1@88.404,46.101 ccw(c86.9,46.101) 87.963,47.165 ccw(c89.027,48.228) P18.1@89.027,46.724 ; P18.1@88.658,46.101 ccw(c87.767,46.101) 88.397,46.731 ccw(c89.027,47.361) P18.1@89.027,46.47 ; v1(95.377,43.053) 95.458,43.053 96.194,43.79 U9.30@96.194,44.637 ; v1@95.377,43.276 ccw(c95.377,44.01) 95.896,43.491 ; v1@95.6,43.053 cw(c95.943,43.053) 95.701,43.296 ; 96.089,43.684 ccw(c95.834,43.939) U9.30@96.194,43.939 ; 84.19,43.064 83.312,43.942 83.312,46.228 84.212,47.128
  Bottom Layer w0.254: v1@85.186,48.672 ccw(c84.806,49.052) 85.344,49.052 ccw(c85.882,49.052) v1@85.502,48.672 ; v1(85.344,48.514) 85.344,51.943 85.979,52.578 87.249,52.578 87.503,52.324 v1(87.503,51.689) ; v1@87.345,51.847 ccw(c86.965,52.227) 87.503,52.227 ccw(c88.041,52.227) v1@87.661,51.847 ; P18.1@88.586,45.66 cw(c87.523,44.597) 89.027,44.597 cw(c90.531,44.597) P18.1@89.468,45.66 ; P18.1@88.766,45.84 cw(c88.136,45.21) 89.027,45.21 cw(c89.918,45.21) P18.1@89.288,45.84 ; P18.1@89.027,46.101 89.027,44.323 90.805,42.545 94.869,42.545 v1(95.377,43.053) ; v1@95.154,43.053 cw(c94.616,43.053) 94.996,42.672 cw(c95.377,42.292) v1@95.377,42.83
RXD: P12.1 U8.2 | length 21.1
  Top Layer w0.25: P12.1@88.712,113.477 cw(c87.645,112.41) 89.154,112.41 cw(c90.663,112.41) P12.1@89.596,113.477 ; P12.1@88.889,113.654 cw(c88.249,113.014) 89.154,113.014 cw(c90.059,113.014) P12.1@89.419,113.654 ; P12.1@89.154,113.919 89.154,110.109 90.043,109.22 v1(91.44,109.22) ; v1@91.281,109.061 ccw(c90.897,108.677) 90.897,109.22 ccw(c90.897,109.763) v1@91.281,109.379
  Bottom Layer w0.25: v1(91.44,109.22) 92.456,109.22 93.091,108.585 97.663,108.585 97.917,108.839 ; v1@91.599,109.061 cw(c91.983,108.677) 91.983,109.22 cw(c91.983,109.763) v1@91.599,109.379 ; U8.2@97.76,109.212 cw(c97.396,108.839) 97.917,108.839 ; U8.2@97.917,110.273 97.917,108.839 ; U8.2@98.074,109.212 ccw(c98.438,108.839) 97.917,108.839
SWCLK1: P17.2 U9.37 | length 21.9
  Top Layer w0.25: P17.2@96.19,36.405 ccw(c96.093,36.689) 96.393,36.689 ; P17.2@96.393,35.814 96.393,36.689 ; P17.2@96.596,36.405 cw(c96.693,36.689) 96.393,36.689 ; U9.37@101.044,46.487 101.05,46.482 v1(102.489,46.482) ; v1@101.568,41.116 cw(c101.132,40.68) 101.748,40.68 ; 101.748,40.783 cw(c102.219,40.783) v1@101.886,41.116 ; v1@101.748,41.254 101.748,38.697 99.995,36.943 96.647,36.943 96.393,36.689 ; v1@102.33,46.323 ccw(c101.946,45.939) 101.946,46.482 ccw(c101.946,47.025) v1@102.33,46.641
  Bottom Layer w0.25: 101.063,41.775 ccw(c101.727,42.438) v1@101.727,41.5 ; v1(101.727,41.275) 101.563,41.275 100.369,42.469 100.369,43.473 102.489,45.593 v1(102.489,46.482) ; v1@102.33,46.323 cw(c101.946,45.939) 102.489,45.939 cw(c103.032,45.939) v1@102.648,46.323
SWDIO1: P17.3 U9.34 | length 17.1
  Top Layer w0.25: P17.3@93.641,36.402 ccw(c93.533,36.703) 93.853,36.703 ; P17.3@93.853,35.814 93.853,36.703 ; P17.3@94.065,36.402 cw(c94.173,36.703) 93.853,36.703 ; U9.34@98.194,44.637 98.194,43.665 101.346,40.513 101.346,38.864 99.828,37.346 94.496,37.346 93.853,36.703
SWIM: R43.2 R44.2 R46.2 U9.22 U9.45 | length 73.9
  Top Layer w0.254: 90.762,47.328 cw(c91.146,46.945) 91.146,47.487 ccw(c91.079,47.126) 90.82,47.386 ; U9.22@91.844,47.487 91.834,47.498 90.932,47.498 90.678,47.244 90.678,37.533 94.302,33.909 108.077,33.909 109.104,34.936 ; U9.45@101.044,50.487 101.967,50.487 103.18,51.7 ; U9.45@101.743,50.487 ccw(c101.743,51.028) 102.125,50.646 ; R44.2@103.482,51.505 ccw(c103.18,51.368) 103.18,51.7 ; R44.2@103.482,51.895 cw(c103.18,52.032) 103.18,51.7 ; R44.2@104.447,51.366 cw(c105.255,50.558) 105.255,51.7 cw(c105.255,52.842) R44.2@104.447,52.034 ; R46.2@109.143,36.646 cw(c108.987,36.322) 109.347,36.322 ; 109.342,36.327 cw(c108.216,35.2) R43.2@109.792,34.968 ; R46.2@109.551,36.646 ccw(c109.707,36.322) 109.347,36.322 ; R43.2@109.621,34.666 ccw(c109.104,34.307) 109.104,34.936 ; R43.2@109.621,35.206 cw(c109.104,35.565) 109.104,34.936 ; R46.2@109.635,37.186 ccw(c110.04,37.431) R46.2@110.04,36.957 ; v1@109.697,41.752 cw(c109.317,41.372) 109.855,41.372 cw(c110.393,41.372) v1@110.013,41.752 ; 109.7,35.969 cw(c108.839,35.108) R43.2@110.044,34.931 ; v1@109.704,49.948 ccw(c109.388,50.292) 109.855,50.292 ; R46.2@109.781,36.739 cw(c110.309,36.211) 110.309,36.957 ; R43.2@109.844,34.671 R43.2@110.109,34.936 109.104,34.936 ; R46.2@109.852,37.317 ccw(c110.49,37.702) 110.49,36.957 ; v1(109.855,41.91) 109.855,40.767 110.871,39.751 110.871,37.338 110.49,36.957 ; v1(109.855,49.784) 109.855,50.292 ; v1@110.006,49.948 cw(c110.322,50.292) 109.855,50.292 ; 110.057,35.612 cw(c109.462,35.016) R43.2@110.295,34.894 ; 110.109,35.56 109.347,36.322 ; 103.18,51.7 108.447,51.7 109.855,50.292 ; 109.347,36.322 R46.2@109.347,37.073 109.463,36.957 110.49,36.957
  Bottom Layer w0.254: v1@109.697,42.068 ccw(c109.317,42.448) 109.855,42.448 ccw(c110.393,42.448) v1@110.013,42.068 ; v1@109.697,49.626 cw(c109.317,49.246) 109.855,49.246 cw(c110.393,49.246) v1@110.013,49.626 ; v1(109.855,41.91) v1(109.855,49.784)
SWIM_IN: R44.1 U9.21 U9.43 U9.46 | length 73.5
  Top Layer w0.254: v1(87.503,49.657) 87.516,49.67 89.522,49.67 90.424,48.768 90.424,48.387 90.824,47.987 U9.21@91.844,47.987 ; v1@87.661,49.499 cw(c88.074,49.086) 88.074,49.67 ; v1@87.661,49.815 ccw(c88.009,50.163) 88.009,49.67 ; U9.46@101.743,50.987 ccw(c101.743,51.347) 101.997,51.093 ; v1@102.839,53.055 cw(c102.459,52.675) 102.997,52.675 cw(c103.535,52.675) v1@103.155,53.055 ; v1(102.997,53.213) 102.997,52.092 101.892,50.987 U9.46@101.044,50.987 99.882,50.987 99.568,50.673 99.568,49.911 99.992,49.487 U9.43@101.044,49.487 R44.1@103.6,49.487 ; v1@108.046,35.718 ccw(c107.666,36.098) 108.204,36.098 ccw(c108.742,36.098) v1@108.362,35.718 ; v1@108.046,40.609 cw(c107.666,40.229) 108.204,40.229 cw(c108.742,40.229) v1@108.362,40.609 ; v1(108.204,35.56) v1(108.204,40.767)
  Bottom Layer w0.254: v1@87.345,49.499 cw(c86.965,49.119) 87.503,49.119 cw(c88.041,49.119) v1@87.661,49.499 ; v1(87.503,49.657) 87.503,44.51 90.383,41.631 95.912,41.631 101.982,35.56 v1(108.204,35.56) ; v1(102.997,53.213) 105.918,53.213 108.204,50.927 v1(108.204,40.767) ; v1@103.155,53.055 cw(c103.535,52.675) 103.535,53.213 cw(c103.535,53.751) v1@103.155,53.371 ; v1@108.046,35.402 ccw(c107.666,35.022) 107.666,35.56 ccw(c107.666,36.098) v1@108.046,35.718 ; v1@108.046,40.925 ccw(c107.666,41.305) 108.204,41.305 ccw(c108.742,41.305) v1@108.362,40.925
SWIM_RST: R48.2 R49.2 U9.42 | length 15.9
  Top Layer w0.25: U9.42@101.044,48.987 R48.2@106.507,48.987 ; 105.016,48.987 ccw(c105.016,50.724) R48.2@106.244,49.496 ; 105.62,48.987 ccw(c105.62,50.12) R48.2@106.421,49.319 ; 105.85,48.987 cw(c105.85,48.431) R48.2@106.244,48.824 ; R48.2@106.78,48.935 cw(c106.78,46.82) 108.275,48.316 ; R48.2@106.78,49.185 cw(c106.78,47.674) 107.849,48.742 ; R48.2@106.78,49.435 cw(c106.78,48.527) 107.422,49.169 ; 107.431,49.16 108.447,48.144 ; R49.2@109.145,47.829 ccw(c108.447,47.212) 108.447,48.144 ; R49.2@109.145,48.459 cw(c108.447,49.076) 108.447,48.144 ; R49.2@109.601,48.144 108.447,48.144
SWIM_RST_IN: R48.1 U9.41 | length 7.9
  Top Layer w0.25: U9.41@101.044,48.487 103.532,48.487 104.659,47.36 R48.1@106.68,47.36 ; R48.1@106.244,47.024 ccw(c105.433,46.213) 105.433,47.36 ccw(c105.433,48.507) R48.1@106.244,47.696
T_JTCK: R47.2 U9.15 U9.26 | length 70.6
  Top Layer w0.254: v1(90.297,50.927) 90.357,50.987 U9.15@91.844,50.987 ; v1@90.455,50.769 cw(c90.981,50.243) 90.981,50.987 ; v1@90.455,51.085 ccw(c90.69,51.32) 90.69,50.987 ; v1@91.725,37.211 ccw(c91.187,37.211) 91.567,37.592 ccw(c91.948,37.972) v1@91.948,37.434 ; v1(91.948,37.211) 91.44,37.719 91.44,40.132 91.694,40.386 92.71,40.386 93.366,41.042 93.366,42.853 94.194,43.681 U9.26@94.194,44.637 ; v1(98.679,37.973) 99.695,38.989 v1(100.584,38.989) ; v1@98.679,38.196 ccw(c98.679,38.734) 99.06,38.354 ccw(c99.44,37.973) v1@98.902,37.973 ; v1@100.426,38.831 ccw(c100.046,38.451) 100.046,38.989 ccw(c100.046,39.527) v1@100.426,39.147 ; v1@102.712,39.147 ccw(c102.332,39.527) 102.87,39.527 ccw(c103.408,39.527) v1@103.028,39.147 ; v1@102.712,42.133 cw(c102.332,41.753) 102.87,41.753 cw(c103.408,41.753) v1@103.028,42.133 ; v1(102.87,38.989) v1(102.87,42.291) ; R47.2@104.491,53.044 cw(c104.426,52.843) 104.637,52.843 ; R47.2@104.783,53.044 ccw(c104.848,52.843) 104.637,52.843 ; v1@105.373,52.3 ccw(c105.029,51.984) 105.029,52.451 ; v1@105.373,52.602 cw(c105.029,52.918) 105.029,52.451 ; v1(105.537,52.451) 105.029,52.451 ; 104.637,52.843 105.029,52.451
  Bottom Layer w0.254: 89.8,50.498 cw(c90.297,50.001) v1@90.297,50.704 ; 89.965,50.663 ccw(c89.7,50.927) v1@90.074,50.927 ; v1(90.297,50.927) 90.229,50.927 89.34,50.038 88.012,50.038 87.764,50.286 87.116,50.286 86.741,49.911 86.741,44.698 89.275,42.163 89.275,39.376 91.44,37.211 ; v1@91.784,37.06 ccw(c91.44,36.744) 91.44,37.211 ; v1@91.784,37.362 cw(c91.44,37.678) 91.44,37.211 ; v1@92.106,37.053 cw(c92.486,36.673) 92.486,37.211 cw(c92.486,37.749) v1@92.106,37.369 ; v1@98.456,37.973 cw(c97.918,37.973) 98.298,37.592 cw(c98.679,37.212) v1@98.679,37.75 ; v1(98.679,37.973) 97.917,37.211 v1(91.948,37.211) 91.44,37.211 ; v1(100.584,38.989) v1(102.87,38.989) ; v1@100.742,38.831 cw(c101.122,38.451) 101.122,38.989 cw(c101.122,39.527) v1@100.742,39.147 ; v1@102.712,38.831 ccw(c102.332,38.451) 102.332,38.989 ccw(c102.332,39.527) v1@102.712,39.147 ; v1@102.712,42.449 ccw(c102.332,42.829) 102.87,42.829 ccw(c103.408,42.829) v1@103.028,42.449 ; v1(102.87,42.291) 102.87,44.577 105.537,47.244 v1(105.537,52.451) ; v1@105.379,52.293 cw(c104.999,51.913) 105.537,51.913 cw(c106.075,51.913) v1@105.695,52.293
T_JTMS: R39.1 R45.2 U9.27 | length 13
  Top Layer w0.254: R39.1@94.085,42.582 ccw(c94.003,42.81) 94.245,42.81 ; R39.1@94.217,42.116 cw(c94.668,42.444) 94.274,42.839 ; R39.1@94.405,42.582 cw(c94.487,42.81) 94.245,42.81 ; R39.1@94.422,42.266 cw(c94.912,42.621) 94.484,43.049 ; R39.1@94.579,41.703 cw(c95.387,40.895) 95.387,42.037 cw(c95.387,43.179) R39.1@94.579,42.371 ; R39.1@94.628,42.415 cw(c95.156,42.798) 94.694,43.259 ; U9.27@94.694,44.637 94.694,43.259 ; R45.2@96.195,40.712 ccw(c95.571,41.413) 96.509,41.413 ; R45.2@96.509,40.259 96.509,41.413 ; R45.2@96.823,40.712 cw(c97.447,41.413) 96.509,41.413 ; 94.245,42.81 R39.1@94.245,42.037 95.885,42.037 96.509,41.413 ; 94.245,42.81 94.694,43.259
T_SWDIO_IN: R39.2 U9.25 | length 5.1
  Top Layer w0.254: R39.2@92.111,42.471 ccw(c91.303,43.279) 92.445,43.279 ccw(c93.587,43.279) R39.2@92.779,42.471 ; R39.2@92.445,42.037 92.445,43.931 93.091,44.577 U9.25@93.634,44.577
TX: P18.2 U9.31 | length 20.2
  Top Layer w0.254: 96.536,43.557 ccw(c96.154,43.939) U9.31@96.694,43.939 ; 96.67,42.394 cw(c96.342,42.065) v1@96.805,42.036 ; U9.31@96.694,44.637 96.694,43.715 96.399,43.419 96.399,42.665 96.775,42.289 v1(96.775,42.038)
  Bottom Layer w0.254: P18.2@88.441,48.428 ccw(c88.138,48.318) 88.138,48.641 ; P18.2@88.441,48.854 cw(c88.138,48.964) 88.138,48.641 ; P18.2@89.027,48.641 88.138,48.641 ; 96.235,42.037 ccw(c96.235,42.577) v1@96.617,42.195 ; 96.238,42.037 cw(c96.238,41.501) v1@96.617,41.88 ; v1(96.775,42.038) 90.551,42.037 87.909,44.679 87.909,48.412 88.138,48.641

## Text inside footprints (layer, text, board x,y; h text height)
C13: Top Overlay "+" at 119.304,70.231 h1.5
C14: Top Overlay "+" at 112.395,66.37 h1.5 r270
C15: Top Overlay "+" at 105.283,70.307 h1.5 r270
C17: Top Overlay "+" at 110.744,40.564 h1.5 r90
C18: Top Overlay "+" at 112.141,54.61 h1.5 r270
U5: Top Overlay "2" at 34.417,47.498 h1.27 r90; Top Overlay "1" at 36.957,48.006 h1.27 r90; Top Overlay "7" at 36.957,59.182 h1.27 r90; Top Overlay "8" at 34.417,59.182 h1.27 r90